# EAGLE board Main_RIGHT (EAGLE 9.2.2)

Size 155 x 114 mm. Coordinates in mm from the lower left corner, seen from the top.
Outline: 155,0 0,0 0,114 155,114 155,0
Copper layers (1*16): Top 0.035mm / dielectric 1.5mm / Bottom 0.035mm
Design rules "default": minimum track width 6mil, minimum drill 0.35mm, track to track 6mil, track to pad 6mil, pad to pad 6mil, via to via 6mil, smd to smd 6mil, copper to edge 40mil, drill to drill 6mil, minimum pad ring 10mil, minimum via ring 8mil, stop-mask expansion 4mil, vias tented up to drill 0mil, thermal gap 10mil

## Footprints (pad centres in the part's own frame; a part is rotated, then mirrored left to right if it is on the bottom)
C025-025X050 = drill 0.813 octagon: 1 -1.27,0; 2 1.27,0
E2,5-6 = drill 0.813 pad 1.6: + -1.27,0 | drill 0.813 pad 1.6 octagon: - 1.27,0
1X02 = drill 1.016 long: 1 -1.27,0; 2 1.27,0
0207/7 = drill 0.813 octagon: 1 -3.81,0; 2 3.81,0
AT-MT9P = drill 1.016 long: 1 24.08,31; 2 19,31; 3 13.92,31; 4 8.84,31; 5 8.84,3; 6 13.92,2.9; 7 19,3; 8 24.08,3; 9 29.16,3; NC 29.16,31

## Placement (x,y rotation side)
C1  0.1u  [C025-025X050]  82.61,30.64 0 top
C2  0.1u  [C025-025X050]  39.96,26.64 0 top
C3  0.1u  [C025-025X050]  102.31,84.64 0 top
C4  220u  [E2,5-6]  102.32,90.74 0 top
HEATER_VCC  [1X02]  73.61,93.47 0 top
INPUT  [1X02]  133.23,19.47 0 top
OUT_TRANSFORMER  [1X02]  46.64,93.47 0 top
R1  220k  [0207/7]  82.78,25.82 0 top
R2  3.9k  [0207/7]  82.94,20.82 0 top
R3  51k  [0207/7]  83.1,35.82 0 top
R4  1M  [0207/7]  40.26,21.82 0 top
R5  1.5k  [0207/7]  40.42,31.82 0 top
R6  100k  [0207/7]  40.58,36.82 0 top
R7  220k  [0207/7]  101.78,78.9 0 top
R8  180  [0207/7]  101.94,95.9 0 top
V1  [AT-MT9P]  63.93,8.2 90 top
V2  [AT-MT9P]  149.87,70.13 90 top
VCC  [1X02]  86.58,93.47 0 top

## Library data of the parts
C1-C4 HEATER_VCC INPUT OUT_TRANSFORMER R1-R8 V1 V2 VCC = VacuumTube

## Nets
GND: C4.- HEATER_VCC.1 INPUT.1 R1.1 R2.1 R6.1 R7.2 R8.2 V1.9 V2.5 VCC.1
N$1: R3.1 V1.6
N$2: R2.2 V1.8
N$4: INPUT.2
N$5: C1.2 R1.2 V1.7
N$6: R5.2 V1.3
N$7: C1.1
N$8: R4.1 R5.1 R6.2
N$9: C2.2 R4.2 V1.2
N$10: C2.1
N$12: C3.1
N$13: C3.2 R7.1 V2.2
N$14: C4.+ R8.1 V2.3
N$15: V2.7
N$16: OUT_TRANSFORMER.1
N$17: V2.9
VCC: HEATER_VCC.2 OUT_TRANSFORMER.2 R3.2 V1.1 V1.4 V1.5 V2.4 VCC.2

## Tracks (layer width: path | path; a pad name or v marks a point on that pad's centre or on a via)
GND  (10 unrouted)
N$1  (1 unrouted)
N$2  (1 unrouted)
N$5  (2 unrouted)
N$6  (1 unrouted)
N$8  (2 unrouted)
N$9  (2 unrouted)
N$13  (2 unrouted)
N$14  (2 unrouted)
VCC  (7 unrouted)